# Altium PCB 175-00016_rev2 SuperFin GPIO Apps Board.PcbDoc (part 2 of 2)
Units mil, origin at the board's own origin, x right, y up, seen from the top; angles counter-clockwise.
Board outline 3307.09 x 1358.27 mil, 6 copper layers (Top Layer (*.GTL), Mid-Layer 1 (*.G1), Internal Plane 1 (*.GP1), Internal Plane 2 (GP2), Internal Plane 3 (GP3), Bottom Layer (GBL)); 57 components, 95 nets, 358 pads, 100 vias.
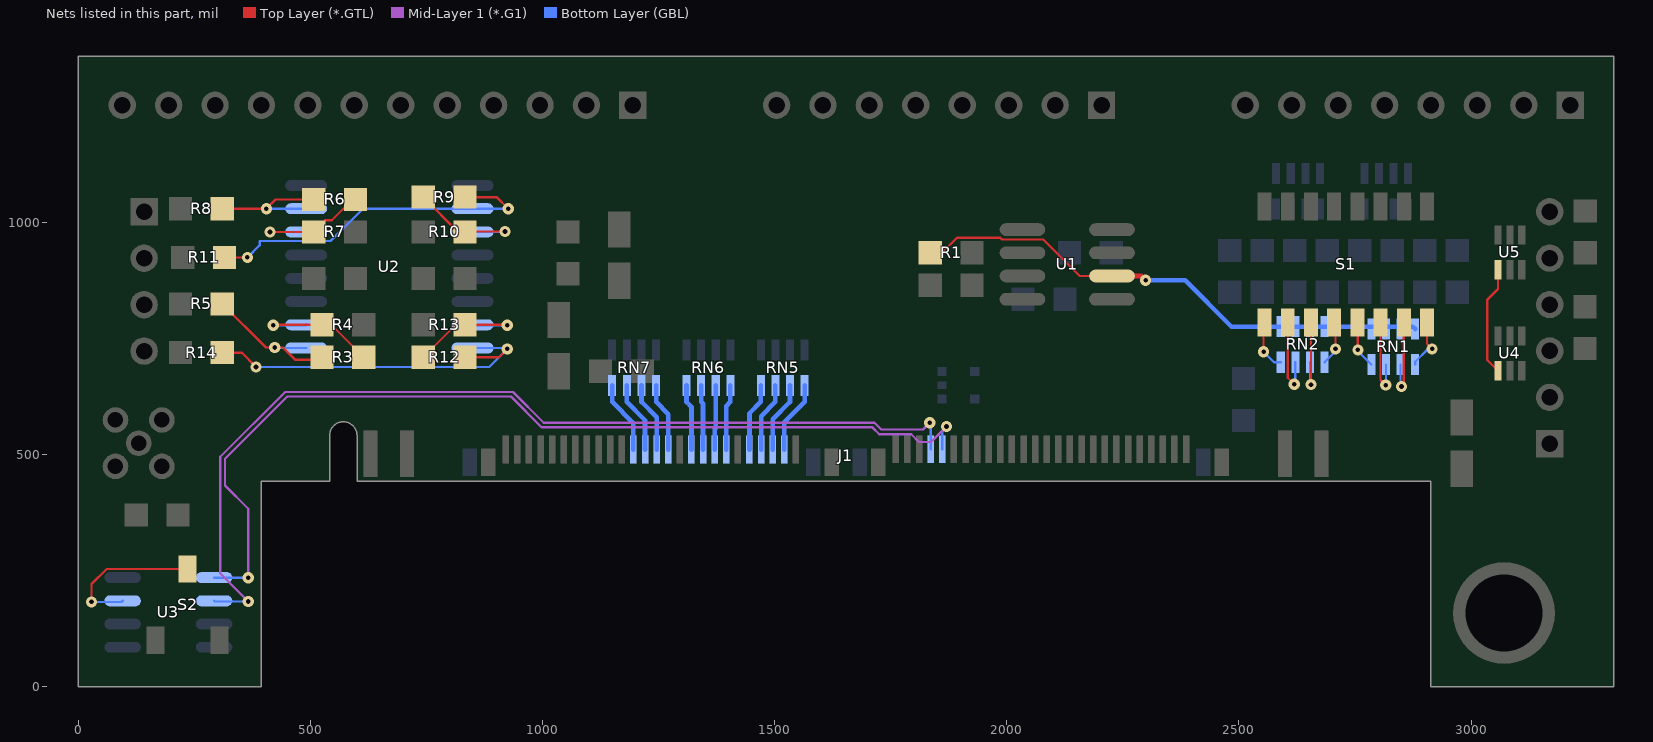
[diagram p6: the nets of this part, all layers, seen from the top]

## Via types
v1: diameter 24, hole 10, Top Layer (*.GTL) to Bottom Layer (GBL), 100 vias

## Nets (pads, with @x,y where several pads share a name; then routed paths per layer and width w, separated by ;. In a path a pad name is that pad's centre, name@x,y a point inside that pad or via, vN(x,y) a via of type N, cw(c..) or ccw(c..) an arc to the next point about the centre after c; other vN are vias at no path point) (continued)
NetR1_2: R1.2 RN1.1 RN1.3 RN1.5 RN1.7 RN2.1 RN2.3 RN2.5 RN2.7 U1.6 | length 1139.3
  Top Layer (*.GTL) w5: R1.2@1835,935 1860,935 1892.5,967.5 1985.52,967.5 1989.3,963.72 2078.28,963.72 2157,885 U1.6@2226.46,885
  Top Layer (*.GTL) w10: U1.6@2226.46,885 2290,885 v1(2299,876)
  Bottom Layer (GBL) w10: v1(2299,876) 2384,876 2483.94,776.06 RN2.1@2590,776.06 RN2.3@2621.5,776.06 RN2.5@2652.99,776.06 RN2.7@2684.49,776.06 2874.49,776.06 RN1.7@2879.49,771.06
NetR3_1: R3.1 R4.2 U2.2 | length 295.7
  Top Layer (*.GTL) w5: v1(420,779) 421,780 R4.2@525,780 545,780 R3.1@615,710
  Bottom Layer (GBL) w5: v1(420,779) 489.87,779 U2.2@490.87,780
NetR3_2: R3.2 R5.2 U2.1 | length 335.1
  Top Layer (*.GTL) w5: R5.2@310,825 404,731 v1(423,731) 441,731 467,705 520,705 R3.2@525,710
  Bottom Layer (GBL) w5: v1(423,731) 424,730 U2.1@490.87,730
NetR6_1: R6.1 R7.2 U2.6 | length 290.8
  Top Layer (*.GTL) w5: v1(413,980) R7.2@506.89,980 531.89,1005 546,1005 591,1050 R6.1@596.89,1050
  Bottom Layer (GBL) w5: v1(413,980) U2.6@490.87,980
NetR6_2: R6.2 R8.2 U2.7 | length 291
  Top Layer (*.GTL) w5: R8.2@310,1030 v1(405,1030) 425,1050 R6.2@506.89,1050
  Bottom Layer (GBL) w5: v1(405,1030) U2.7@490.87,1030
NetR9_1: R9.1 R10.2 U2.11 | length 277.7
  Top Layer (*.GTL) w5: R9.1@743.11,1055 818.11,980 R10.2@833.11,980 834.11,981 v1(919,981)
  Bottom Layer (GBL) w5: U2.11@849.13,980 918,980 v1(919,981)
NetR9_2: R9.2 R11.2 U2.10 | length 763
  Top Layer (*.GTL) w5: R11.2@315,925 363.98,925 v1(364.17,925.2) ; R9.2@833.11,1055 901,1055 v1(926,1030)
  Bottom Layer (GBL) w5: v1(364.17,925.2) 390.5,951.52 390.5,960.5 543.45,960.5 612.95,1030 U2.10@849.13,1030 v1(926,1030)
NetR12_1: R12.1 R13.2 U2.15 | length 285.6
  Top Layer (*.GTL) w5: R12.1@743.11,710 813.11,780 R13.2@833.11,780 923,780 v1(924,779)
  Bottom Layer (GBL) w5: U2.15@849.13,780 850.13,779 v1(924,779)
NetR12_2: R12.2 R14.2 U2.16 | length 817
  Top Layer (*.GTL) w5: R14.2@310,720 351.87,720 v1(382.87,689) ; R12.2@833.11,710 906,710 v1(924,728)
  Bottom Layer (GBL) w5: v1(382.87,689) 885,689 v1(924,728) 922,730 U2.16@849.13,730
NetRN1_2: RN1.2 S1.13 | length 103.1
  Top Layer (*.GTL) w5: S1.13@2755,785 2756,784 v1(2756,726)
  Bottom Layer (GBL) w5: v1(2756,726) 2756,723.29 RN1.2@2785,694.29
NetRN1_4: RN1.4 S1.14 | length 184.1
  Top Layer (*.GTL) w5: S1.14@2805,785 2805,661 v1(2816,650)
  Bottom Layer (GBL) w5: v1(2816,650) 2816.5,650.5 RN1.4@2816.5,694.29
NetRN1_6: RN1.6 S1.15 | length 188.2
  Top Layer (*.GTL) w5: v1(2850,647) 2855,652 S1.15@2855,785
  Bottom Layer (GBL) w5: RN1.6@2847.99,694.29 2847.99,649.01 v1(2850,647)
NetRN1_8: RN1.8 S1.16 | length 106.7
  Top Layer (*.GTL) w5: S1.16@2905,785 2905,739 v1(2916,728)
  Bottom Layer (GBL) w5: RN1.8@2879.49,694.29 2879.49,700.49 v1@2907,728
NetRN2_2: RN2.2 S1.9 | length 110.2
  Top Layer (*.GTL) w5: v1(2553,722) 2553,783 S1.9@2555,785
  Bottom Layer (GBL) w5: v1(2553,722) 2575.71,699.29 RN2.2@2590,699.29
NetRN2_4: RN2.4 S1.10 | length 187.1
  Top Layer (*.GTL) w5: S1.10@2605,785 2605,666 v1(2619,652)
  Bottom Layer (GBL) w5: v1(2619,652) 2621.5,654.5 RN2.4@2621.5,699.29
NetRN2_6: RN2.6 S1.11 | length 183.1
  Top Layer (*.GTL) w5: v1(2655,651) S1.11@2655,785
  Bottom Layer (GBL) w5: RN2.6@2652.99,699.29 2652.99,653.01 v1(2655,651)
NetRN2_8: RN2.8 S1.12 | length 96.7
  Top Layer (*.GTL) w5: S1.12@2705,785 2708,782 v1(2708,728)
  Bottom Layer (GBL) w5: RN2.8@2684.49,699.29 2708,722.8 v1(2708,728)
NetS2_2: S2.2 U3.7 | length 326.4
  Top Layer (*.GTL) w5: v1(28.54,183.07) 28.54,221.46 61.02,253.94 S2.2@235.24,253.94
  Bottom Layer (GBL) w5: v1(28.54,183.07) 93.11,183.07 U3.7@95.47,185.43
NetU4_4: U4.4 U5.4 | length 237.1
  Top Layer (*.GTL) w5: U4.4@3058.07,681.1 3034.45,704.72 3034.45,833.66 3058.07,857.28 U5.4@3058.07,898.62
OPTO_INPUT_0: J1.56 RN5.8 | length 156.4
  Bottom Layer (GBL) w10: J1.56@1520.65,511 1520.65,569.98 1564.49,613.81 RN5.8@1564.49,649.29
OPTO_INPUT_1: J1.58 RN5.6 | length 153.8
  Bottom Layer (GBL) w10: J1.58@1495.65,511 1495.65,576.47 1532.99,613.81 RN5.6@1532.99,649.29
OPTO_INPUT_2: J1.60 RN5.4 | length 151.1
  Bottom Layer (GBL) w10: J1.60@1470.65,511 1470.65,582.97 1501.5,613.81 RN5.4@1501.5,649.29
OPTO_INPUT_3: J1.62 RN5.2 | length 148.4
  Bottom Layer (GBL) w10: J1.62@1445.65,511 1445.65,589.46 1470,613.81 RN5.2@1470,649.29
OPTO_INPUT_4: J1.66 RN6.8 | length 142
  Bottom Layer (GBL) w10: J1.66@1395.65,511 1395.65,604.98 1404.49,613.81 RN6.8@1404.49,649.29
OPTO_INPUT_5: J1.68 RN6.6 | length 139.3
  Bottom Layer (GBL) w10: J1.68@1370.65,511 1370.65,554.76 1372.99,557.1 RN6.6@1372.99,649.29
OPTO_INPUT_6: J1.70 RN6.4 | length 140
  Bottom Layer (GBL) w10: RN6.4@1341.5,649.29 1341.5,613.81 1345.65,609.66 J1.70@1345.65,511
OPTO_INPUT_7: J1.72 RN6.2 | length 142.7
  Bottom Layer (GBL) w10: RN6.2@1310,649.29 1310,613.81 1320.65,603.16 J1.72@1320.65,511
OPTO_INPUT_8: J1.76 RN7.8 | length 149.1
  Bottom Layer (GBL) w10: RN7.8@1244.49,649.29 1244.49,613.81 1270.65,587.65 J1.76@1270.65,511
OPTO_INPUT_9: J1.78 RN7.6 | length 151.8
  Bottom Layer (GBL) w10: RN7.6@1212.99,649.29 1212.99,613.81 1245.65,581.15 J1.78@1245.65,511
OPTO_INPUT_10: J1.80 RN7.4 | length 154.5
  Bottom Layer (GBL) w10: RN7.4@1181.5,649.29 1181.5,613.81 1220.65,574.66 J1.80@1220.65,511
OPTO_INPUT_11: J1.82 RN7.2 | length 157.2
  Bottom Layer (GBL) w10: RN7.2@1150,649.29 1150,613.81 1195.65,568.16 J1.82@1195.65,511
SLOT_ID0: J1.44 U3.1 | length 2067.5
  Mid-Layer 1 (*.G1) w5: v1(366.14,235.24) 366.14,383.86 315.94,434.06 315.94,491.5 449.8,625.35 932.05,625.35 998.4,559 1710.48,559 1725.19,544.29 1794.27,544.29 1811,527.56 1836.56,527.56 v1(1870,561)
  Bottom Layer (GBL) w5: U3.1@292.32,235.43 292.52,235.24 v1(366.14,235.24) ; J1.44@1860.99,512.06 1860.99,549.99 1870,559 v1(1870,561)
SLOT_ID1: J1.46 U3.2 | length 2094.3
  Mid-Layer 1 (*.G1) w5: v1(366.14,184.06) 305.94,244.25 305.94,495.64 445.66,635.35 936.19,635.35 1002.54,569 1714.62,569 1729.33,554.29 1819.29,554.29 v1(1834,569)
  Bottom Layer (GBL) w5: U3.2@292.32,185.43 293.7,184.06 v1(366.14,184.06) ; v1(1834,569) 1835.99,567.01 J1.46@1835.99,512.06
pads on no net: J1.0 J1.7 J1.9 J1.23 J1.24 J1.25 J1.26 J1.27 J1.28 J1.29 J1.30 J1.34 J1.36 J1.38 J1.40 J1.43 J1.45 J1.47 J1.75 J1.77 J1.79 J1.81 J1.85 J1.86 J1.87 J1.88 J1.89 J1.90 J1.91 J1.92 J1.95 J1.96 J1.97 J1.98 J1.99 J1.100 J1.101 J1.102 U1.1 U1.5 U1.8 U2.8 U2.9 U4.3
copper on no net: | length 279.9
  Bottom Layer (GBL) w10: 1869.35,1062.99 ccw(c1824.8,1062.99) 1869.35,1062.99

## Polygon pours and split planes (outlines as drawn)
GND on Internal Plane 1 (*.GP1) (split plane): 3286.99,442.91 3286.99,20.1 2933.48,20.1 2933.48,442.91 2933.1,446.83 2931.95,450.6 2930.1,454.08 2927.6,457.12 2924.55,459.62 2921.08,461.48 2917.31,462.62 2913.39,463.01 620.39,463.01 620.39,541.34 620.35,541.78 620.06,546.89 619.13,552.38 617.59,557.72 615.46,562.86 612.77,567.73 609.55,572.27 605.84,576.42 601.69,580.12 597.16,583.34 592.29,586.03 587.15,588.16 581.8,589.7 576.32,590.63 570.77,590.94 565.21,590.63 559.73,589.7 554.38,588.16 549.24,586.03 544.37,583.34 539.84,580.12 535.69,576.42 531.98,572.27 528.76,567.73 526.07,562.86 523.94,557.72 522.4,552.38 521.47,546.89 521.18,541.78 521.14,541.34 521.14,463.01 393.7,463.01 389.78,462.62 386.01,461.48 382.54,459.62 379.49,457.12 376.99,454.08 375.13,450.6 373.99,446.83 373.6,442.91 373.6,20.1 20.1,20.1 20.1,1338.17 3286.99,1338.17
+12V on Internal Plane 2 (GP2) (split plane): 3286.99,442.91 3286.99,20.1 2933.48,20.1 2933.48,442.91 2933.1,446.83 2931.95,450.6 2930.1,454.08 2927.6,457.12 2924.55,459.62 2921.08,461.48 2917.31,462.62 2913.39,463.01 620.39,463.01 620.39,541.34 620.35,541.78 620.06,546.89 619.13,552.38 617.59,557.72 615.46,562.86 612.77,567.73 609.55,572.27 605.84,576.42 601.69,580.12 597.16,583.34 592.29,586.03 587.15,588.16 581.8,589.7 576.32,590.63 570.77,590.94 565.21,590.63 559.73,589.7 554.38,588.16 549.24,586.03 544.37,583.34 539.84,580.12 535.69,576.42 531.98,572.27 528.76,567.73 526.07,562.86 523.94,557.72 522.4,552.38 521.47,546.89 521.18,541.78 521.14,541.34 521.14,463.01 393.7,463.01 389.78,462.62 386.01,461.48 382.54,459.62 379.49,457.12 376.99,454.08 375.13,450.6 373.99,446.83 373.6,442.91 373.6,20.1 20.1,20.1 20.1,1338.17 3286.99,1338.17
-12V on Internal Plane 3 (GP3) (split plane): 3286.99,442.91 3286.99,20.1 2933.48,20.1 2933.48,442.91 2933.1,446.83 2931.95,450.6 2930.1,454.08 2927.6,457.12 2924.55,459.62 2921.08,461.48 2917.31,462.62 2913.39,463.01 620.39,463.01 620.39,541.34 620.35,541.78 620.06,546.89 619.13,552.38 617.59,557.72 615.46,562.86 612.77,567.73 609.55,572.27 605.84,576.42 601.69,580.12 597.16,583.34 592.29,586.03 587.15,588.16 581.8,589.7 576.32,590.63 570.77,590.94 565.21,590.63 559.73,589.7 554.38,588.16 549.24,586.03 544.37,583.34 539.84,580.12 535.69,576.42 531.98,572.27 528.76,567.73 526.07,562.86 523.94,557.72 522.4,552.38 521.47,546.89 521.18,541.78 521.14,541.34 521.14,463.01 393.7,463.01 389.78,462.62 386.01,461.48 382.54,459.62 379.49,457.12 376.99,454.08 375.13,450.6 373.99,446.83 373.6,442.91 373.6,20.1 20.1,20.1 20.1,1338.17 3286.99,1338.17

## Other copper
Top Layer (*.GTL):
  text "*.GTL - TOP LAYER GERBER DATA" at 286.34,-1797.05 h80
Mid-Layer 1 (*.G1):
  text "*.G1 - MID LAYER 1 GERBER DATA" at 286.34,-1797.05 h80
Bottom Layer (GBL):
  text "LCOGT" at 1459.65,1044.29 h50
  text "c  2011" at 1841.54,1044.29 h50
  text "175-00016, rev2" at 1906.5,944.88 h50
  text "*.GBL - BOTTOM LAYER GERBER DATA" at 286.34,-1797.05 h80
Internal Plane 1 (*.GP1) (plane layer: these items are gaps in the copper):
  text "*.GP1 - INTERNAL PLANE LAYER 1 GERBER DATA" at 286.34,-1797.05 h80
Internal Plane 2 (GP2) (plane layer: these items are gaps in the copper):
  text "*.GP2 - INTERNAL PLANE LAYER 2 GERBER DATA" at 286.34,-1797.05 h80
Internal Plane 3 (GP3) (plane layer: these items are gaps in the copper):
  text "*.GP3- INTERNAL PLANE LAYER 3 GERBER DATA" at 286.34,-1797.05 h80

## Silkscreen, mask and mechanical layers (free items; w line width, h text height)
Top Overlay:
  rectangle: 2266.73,1012.8 2455.71,1144.69
  text "SuperFin GPIO Apps Board" at 1236.22,1146.65 h40
  text "780-00019 SCH REV:" at 1556.82,1072.82 h40
  text "PGM" at 102.36,136.81 h30 r90
  text "*.GTO - TOP OVERLAY GERBER DATA" at 286.34,-1797.05 h80
Bottom Overlay:
  lines w7.87: 2380,990 2430,960
  text "1 Hz" at 342.52,561.02 h30
  text "GPS" at 312.99,501.97 h30
  text "*GBO -- BOTTOM OVERLAY GERBER DATA" at 286.34,-1797.05 h80
Top Paste:
  text "*.GTP - TOP-SIDE SOLDER PASTE MASK" at 286.33,-1797.04 h80
Bottom Paste:
  text "*.GBP - BOTTOM-SIDE SOLDER PASTE MASK" at 286.33,-1797.04 h80
Top Solder:
  text "*.GTS - TOP SOLDER MASK GERBER DATA" at 286.34,-1797.05 h80
Bottom Solder:
  rectangle: 1155.51,915.35 1929.13,1134.84
  text "*.GBS - BOTTOM SOLDER MASK GERBER DATA" at 286.34,-1797.05 h80
Mechanical 1:
  lines w39.37: 393.7,442.91 393.7,0 0,0 0,364.17 0,659.45 0,1358.27 3307.09,1358.27 3307.09,816.93 3307.09,442.91 3307.09,0 2913.39,0 2913.39,442.91 1653.54,442.91 600.29,442.91
Mechanical 2:
  lines w10: -13462.66,-7877.05 7537.34,-7877.05 7537.34,8122.95 -13462.66,8122.95 -13462.66,-7877.05 ; 3482.34,-7771.05 ccw(c3532.34,-7771.05) 3532.34,-7821.05 3862.34,-7821.05 ccw(c3862.34,-7781.05) 3902.34,-7781.05 3902.34,-7611.05 ccw(c3862.34,-7611.05) 3862.34,-7571.05 3482.34,-7571.05 3482.34,-7771.05 ; 3482.34,-7481.05 ccw(c3532.34,-7481.05) 3532.34,-7531.05 7432.34,-7531.05 ccw(c7432.34,-7481.05) 7482.34,-7481.05 7482.34,-7291.05 ccw(c7432.34,-7291.05) 7432.34,-7241.05 3482.34,-7241.05 3482.34,-7481.05 ; 3482.34,-7151.05 ccw(c3532.34,-7151.05) 3532.34,-7201.05 5412.34,-7201.05 ccw(c5412.34,-7151.05) 5462.34,-7151.05 5462.34,-7001.05 ccw(c5412.34,-7001.05) 5412.34,-6951.05 3482.34,-6951.05 3482.34,-7151.05 ; 3482.34,-6871.05 ccw(c3522.34,-6871.05) 3522.34,-6911.05 4332.34,-6911.05 ccw(c4332.34,-6861.05) 4382.34,-6861.05 4382.34,-6711.05 ccw(c4332.34,-6711.05) 4332.34,-6661.05 3482.34,-6661.05 3482.34,-6871.05 ; 3942.34,-7781.05 ccw(c3982.34,-7781.05) 3982.34,-7821.05 5942.34,-7821.05 ccw(c5942.34,-7781.05) 5982.34,-7781.05 5982.34,-7611.05 ccw(c5942.34,-7611.05) 5942.34,-7571.05 3942.34,-7571.05 3942.34,-7781.05 ; 4422.34,-6861.05 ccw(c4472.34,-6861.05) 4472.34,-6911.05 5412.34,-6911.05 ccw(c5412.34,-6861.05) 5462.34,-6861.05 5462.34,-6711.05 ccw(c5412.34,-6711.05) 5412.34,-6661.05 4422.34,-6661.05 4422.34,-6861.05 ; 5502.34,-7151.05 ccw(c5552.34,-7151.05) 5552.34,-7201.05 7432.34,-7201.05 ccw(c7432.34,-7151.05) 7482.34,-7151.05 7482.34,-7001.05 ccw(c7432.34,-7001.05) 7432.34,-6951.05 5502.34,-6951.05 5502.34,-7151.05 ; 5502.34,-6861.05 ccw(c5552.34,-6861.05) 5552.34,-6911.05 6492.34,-6911.05 ccw(c6492.34,-6861.05) 6542.34,-6861.05 6542.34,-6711.05 ccw(c6492.34,-6711.05) 6492.34,-6661.05 5502.34,-6661.05 5502.34,-6861.05 ; 6022.34,-7771.05 ccw(c6072.34,-7771.05) 6072.34,-7821.05 6402.34,-7821.05 ccw(c6402.34,-7781.05) 6442.34,-7781.05 6442.34,-7611.05 ccw(c6402.34,-7611.05) 6402.34,-7571.05 6022.34,-7571.05 6022.34,-7771.05 ; 6482.34,-7781.05 ccw(c6522.34,-7781.05) 6522.34,-7821.05 7432.34,-7821.05 ccw(c7432.34,-7771.05) 7482.34,-7771.05 7482.34,-7621.05 ccw(c7432.34,-7621.05) 7432.34,-7571.05 6482.34,-7571.05 6482.34,-7781.05 ; 6582.34,-6861.05 ccw(c6632.34,-6861.05) 6632.34,-6911.05 7432.34,-6911.05 ccw(c7432.34,-6861.05) 7482.34,-6861.05 7482.34,-6711.05 ccw(c7432.34,-6711.05) 7432.34,-6661.05 6582.34,-6661.05 6582.34,-6861.05
  lines w16: -12713.62,-3350.76 -7580.67,-3350.76 ; -12713.62,-3051.86 -7580.67,-3051.86 ; -12773.62,-5578.2 ccw(c-12676.62,-5578.2) -12676.62,-5675.2 -7617.67,-5675.2 ccw(c-7617.67,-5578.2) -7520.67,-5578.2 -7520.67,-2683.61 ccw(c-7617.67,-2683.61) -7617.67,-2586.61 -12676.62,-2586.61 ccw(c-12676.62,-2683.61) -12773.62,-2683.61 -12773.62,-5578.2
  lines w20: -13442.6,-7231.17 cw(c-13392.66,-7306.05) -13392.66,-7216.05 -12932.66,-7216.05 cw(c-12932.66,-7306.05) -12842.66,-7306.05 -12842.66,-7356.05 ccw(c-12832.66,-7356.05) -12832.66,-7366.05 -10192.66,-7366.05 cw(c-10192.66,-7456.05) -10102.66,-7456.05 -10102.66,-7796.05 cw(c-10192.66,-7796.05) -10117.79,-7845.98 ; 3438.51,-7861.03 cw(c3532.34,-7771.05) 3402.34,-7771.05 3402.34,-6101.05 cw(c3532.34,-6101.05) 3532.34,-5971.05 7432.34,-5971.05 cw(c7432.34,-6101.05) 7521,-6005.97 ; -13442.66,-7796.05 ccw(c-13392.66,-7796.05) -13392.66,-7846.05 -10192.66,-7846.05 ccw(c-10192.66,-7796.05) -10142.66,-7796.05 -10142.66,-7456.05 ccw(c-10192.66,-7456.05) -10192.66,-7406.05 -12832.66,-7406.05 cw(c-12832.66,-7356.05) -12882.66,-7356.05 -12882.66,-7306.05 ccw(c-12932.66,-7306.05) -12932.66,-7256.05 -13392.66,-7256.05 ccw(c-13392.66,-7306.05) -13442.66,-7306.05 -13442.66,-7796.05 ; -5932.66,-7697.05 ccw(c-5802.66,-7697.05) -5802.66,-7827.05 -1062.66,-7827.05 ccw(c-1062.66,-7697.05) -932.66,-7697.05 -932.66,-6107.05 ccw(c-1062.66,-6107.05) -1062.66,-5977.05 -5802.66,-5977.05 ccw(c-5802.66,-6107.05) -5932.66,-6107.05 -5932.66,-7697.05 ; 3442.34,-7771.05 ccw(c3532.34,-7771.05) 3532.34,-7861.05 7432.34,-7861.05 ccw(c7432.34,-7771.05) 7522.34,-7771.05 7522.34,-6101.05 ccw(c7432.34,-6101.05) 7432.34,-6011.05 3532.34,-6011.05 ccw(c3532.34,-6101.05) 3442.34,-6101.05 3442.34,-7771.05
  lines w24: -3382.66,-7667.05 -3232.66,-7667.05 ; -3382.66,-7417.05 -3232.66,-7417.05 ; -3382.66,-7167.05 -3232.66,-7167.05 ; -3382.66,-6917.05 -3232.66,-6917.05 ; -3382.66,-6667.05 -3232.66,-6667.05
  lines w30: -13962.66,-8377.05 8037.34,-8377.05 8037.34,8622.95 -13962.66,8622.95 -13962.66,-8377.05
  lines w50: 3627.34,-6512.05 5277.34,-6512.05 ; 3627.34,-6132.05 5277.34,-6132.05 ; 5277.34,-6512.05 3617.34,-6512.05 3617.34,-6132.05 5277.34,-6132.05 ; 5277.34,-6512.05 5277.34,-6132.05
  text "NOTES (UNLESS OTHERWISE SPECIFIED):" at -13142.66,7598.95 h90
  text "GENERAL" at -13042.66,7398.95 h90
  text "1)" at -12942.66,7198.9 h75
  text "PCB IS 6-LAYER, .062\" THICK." at -12742.66,7198.92 h75
  text "2)" at -12942.66,7048.9 h75
  text "CONSTRUCTION IS SOLDER-MASK-OVER-BARE-COPPER (SMOBC)." at -12742.66,7048.9 h75
  text "3)" at -12942.66,6898.9 h75
  text "ACCEPTABILITY SHALL BE BASED ON IPC-A-600, CLASS 2." at -12742.66,6898.9 h75
  text "4)" at -12942.66,6748.9 h75
  text "THE FOLLOWING GERBER RS274X PHOTO TOOL FILES SHALL BE USED TO DEFINE ALL CIRCUIT FEATURES:" at -12742.66,6748.9 h75
  text "*.GTL - TOP LAYER GERBER DATA" at -12468.66,6537.95 h80
  text "*.G1 - MID LAYER 1 GERBER DATA" at -12468.66,6384.29 h80
  text "*.GP1 - INTERNAL PLANE LAYER 1 GERBER DATA" at -12468.66,5923.29 h80
  text "*.GP2 - INTERNAL PLANE LAYER 2 GERBER DATA" at -12468.66,5769.62 h80
  text "*.GP3- INTERNAL PLANE LAYER 3 GERBER DATA" at -12468.66,5615.96 h80
  text "*.GBL - BOTTOM LAYER GERBER DATA" at -12468.66,5154.96 h80
  text "*.GTO - TOP OVERLAY GERBER DATA" at -12468.66,5001.29 h80
  text "*.GTS - TOP SOLDER MASK GERBER DATA" at -12468.66,4847.62 h80
  text "*.GTP - TOP-SIDE SOLDER PASTE MASK" at -12468.67,4693.95 h80
  text "*GBO BOTTOM OVERLAY GERBER DATA" at -12468.66,4540.29 h80
  text "*.GBS - BOTTOM SOLDER MASK GERBER DATA" at -12468.66,4386.63 h80
  text "*.GBP - BOTTOM-SIDE SOLDER PASTE MASK" at -12468.67,4232.95 h80
  text "5)" at -13039.66,3517.19 h75
  text "THE PHOTO TOOL SHALL NOT BE COMPENSATED WITHOUT PRIOR ENGINEERING APPROVAL." at -12839.66,3517.19 h75
  text "PCB DESIGNER: RICH LOBDILL   PH (805) 880-1621  FAX (805) 961-1792." at -12839.66,3367.24 h75
  text "FABRICATION TOLERANCES" at -12984.66,3040.95 h90
  text "6)" at -12884.66,2840.9 h75
  text "END PRODUCT CONDUCTOR WIDTHS AND PAD DIAMETERS SHALL NOT VARY MORE THAN" at -12684.66,2840.9 h75
  text "0.002\" FROM THE 1:1 DIMENSIONS OF THE MASTER ARTWORK." at -12684.66,2690.95 h75
  text "7)" at -12884.66,2540.9 h75
  text "THE CONDUCTIVE PATTERN SHALL BE POSITIONED SO THAT THE LOCATION OF ANY PAD OR" at -12684.66,2540.9 h75
  text "LAND SHALL BE WITHIN 0.005\" DIAMETER TO THE TRUE POSITION OF THE HOLE IT CIRCUMSCRIBES." at -12684.66,2390.95 h75
  text "8)" at -12884.66,2240.9 h75
  text "ALL DRILL HOLE SIZES AND TOLERANCES APPLY AFTER PLATING." at -12684.66,2240.9 h75
  text "9)" at -12884.66,2090.9 h75
  text "THE MINIMUM ANNULAR RING SHALL BE 0.005\"." at -12684.66,2090.9 h75
  text "10)" at -12939.66,1940.9 h75
  text "BOW AND TWIST SHALL NOT EXCEED 0.010\" PER INCH." at -12684.66,1940.9 h75
  text "11)" at -12929.66,1790.9 h75
  text "FOR PCB ROUTING DIMENSIONS: .XXX = +/-.005\"  .XX = +/-.020\"" at -12684.66,1790.9 h75
  text "MATERIAL" at -12984.66,1590.95 h90
  text "12)" at -12939.66,1390.9 h75
  text "BASE MATERIAL IS FR4 EPOXY FIBERGLASS" at -12677.66,1384.95 h75
  text "SEE STACK-UP LEGEND FOR COPPER CLADDING CALL OUTS" at -12677.66,1244.95 h75
  text "13)" at -12939.66,1240.9 h75
  text "PLATING" at -12984.66,1040.95 h90
  text "14)" at -12939.66,845.9 h75
  text "ALL HOLES AND CONDUCTIVE SURFACES SHALL BE PLATED WITH A MINIMUM OF 0.001\" COPPER." at -12684.66,845.9 h75
  text "15)" at -12939.66,695.9 h75
  text "AFTER SOLDERMASK, ALL EXPOSED HOLES AND CONDUCTIVE SURFACES SHALL BE COATED" at -12684.66,695.9 h75
  text "WITH A GOLD IMMERSION PLATING TO PRESERVE SOLDERABILITY." at -12677.66,544.95 h75
  text "COATINGS" at -12984.66,345.95 h90
  text "16)" at -12934.66,150.9 h75
  text "THE SOLDERMASK SHALL BE BLACK LIQUID PHOTO-IMAGEABLE PER IPC-SM-840, TYPE-B, CLASS 2." at -12684.66,150.9 h75
  text "17)" at -12939.66,0.9 h75
  text "THE SOLDERMASK REGISTRATION ALLOWANCE IS 0.003\".  THERE SHALL BE NO SOLDERMASK ON" at -12684.66,0.9 h75
  text "ANY SOLDER PAD OR LAND." at -12684.66,-149.1 h75
  text "MARKING" at -12984.66,-349.05 h90
  text "18)" at -12939.66,-544.1 h75
  text "THE LEGEND SHALL BE SCREEN-PRINTED USING PERMANENT YELLOW EPOXY INK." at -12684.66,-544.1 h75
  text "19)" at -12939.66,-694.1 h75
  text "THE SCREEN PRINTING REGISTRATION ALLOWANCE IS 0.007\".  THERE SHALL BE NO INK ON ANY" at -12684.66,-694.1 h75
  text "SOLDER PAD OR LAND." at -12684.66,-844.05 h75
  text "20)" at -12949.66,-994.1 h75
  text "THE VENDOR CODE AND UL FLAMMABILITY RATING MAY BE ETCHED IN THE FOIL OR MARKED IN" at -12684.66,-994.1 h75
  text "PERMANENT EPOXY INK (VENDOR'S OPTION)." at -12684.66,-1144.05 h75
  text "ELECTRICAL TESTING" at -12984.66,-1344.05 h90
  text "21)" at -12939.66,-1539.1 h75
  text "ALL BOARDS SHALL BE ELECTRICALLY TESTED TO THE SUPPLIED IPC-D-356A NET LIST" at -12684.66,-1539.1 h75
  text "FOR CONTINUITY, OPENS AND SHORTS." at -12684.66,-1689.05 h75
  text "Layer Stack Up Detail for: 175-00016_rev2 SuperFin GPIO Apps Board.PcbDoc" at -12713.62,-2866.44 h69
  text "Layer" at -12713.62,-3163.36 h69
  text "COPPER THICKNESS" at -9296.26,-3226.38 h60
  text "Name" at -12713.62,-3301.36 h69
  text "1/2 oz" at -10039.37,-3527.56 h100
  text "Top Layer (*.GTL)" at -12713.62,-3535.13 h97
  text "1 OZ" at -10039.37,-3841.54 h100
  text "Mid-Layer 1 (*.G1)" at -12713.62,-3887.87 h97
  text "1 OZ" at -10039.37,-4213.58 h100
  text "Internal Plane 1 (*.GP1)" at -12713.62,-4240.61 h97
  text "1 OZ" at -10039.37,-4563.98 h100
  text "Internal Plane 2 (GP2)" at -12713.62,-4593.35 h97
  text "1 OZ" at -10039.37,-4911.42 h100
  text "Internal Plane 3 (GP3) (GP3)" at -12713.62,-4946.09 h97
  text "1/2 oz" at -10039.37,-5262.8 h100
  text "Bottom Layer (GBL)" at -12713.62,-5298.83 h97
  text "Las Cumbres Observatory, Inc." at 5447.34,-6152.05 h90
  text "Las Cumbres Observatory" at 3677.34,-6272.05 h150
  text "PRIMARY PCB SPECIFICATIONS" at -5485.66,-6287.05 h200
  text "6740 Cortona Dr." at 5887.34,-6306.05 h90
  text "Global Telescope Network" at 3837.34,-6432.05 h125
  text "Goleta, CA 93117" at 5837.34,-6456.05 h90
  text "(REFER TO COMPLETE SPEC LISTING AT LEFT FOR FURTHER DETAILS)" at -5832.66,-6492.05 h100
  text "www.lcogt.net" at 5977.34,-6602.05 h90
  text "DATE" at 3502.34,-6712.85 h32
  text "DESIGNED" at 4442.34,-6712.85 h32
  text "DRAWN" at 5522.34,-6712.85 h32
  text "SCALE" at 6602.34,-6712.85 h32
  text "NUMBER OF LAYERS" at -5732.66,-6742.05 h150
  text "6" at -2182.66,-6742.06 h150
  text "Rich Lobdill" at 5827.34,-6812.05 h55
  text "Rich Lobdill" at 4702.34,-6817.05 h55
  text "1 : 1" at 6887.34,-6831.05 h90
  text "3/30/2011" at 3532.34,-6838.05 h90
  text "FINISHED THICKNESS" at -5732.66,-6992.05 h150
  text ".062\"" at -2357.66,-6992.05 h150
  text "CHECKED/DATE" at 3502.34,-7002.85 h32
  text "APPROVED/DATE" at 5522.34,-7002.85 h32
  text "BASE MATERIAL" at -5732.66,-7242.05 h150
  text "FR4" at -2432.66,-7242.05 h150
  text "TITLE" at 3502.34,-7292.85 h32
  text "NOTICE" at -13387.66,-7401.05 h100
  text "175-00016, SuperFin GPIO Apps Board" at 3722.34,-7437.05 h100
  text "GOLD IMMERSION" at -2926.66,-7459.05 h150
  text "PLATING TYPE" at -5732.66,-7492.05 h150
  text "THIS DRAWING EMBODIES A PROPRIETARY DESIGN OWNED BY LAS CUMBRES" at -13352.66,-7516.05 h60
  text "OBSERVATORY.  IT IS SUBMITTED FOR A SPECIFIC PURPOSE UNDER A CON-" at -13352.66,-7616.05 h60
  text "SIZE" at 3502.34,-7622.85 h32
  text "DOC NO." at 3962.34,-7622.85 h32
  text "REV" at 6042.34,-7622.85 h32
  text "SHEET" at 6502.34,-7622.85 h32
  text "FIDENTIAL RELATIONSHIP, AND EXCEPT FOR PURPOSES EXPRESSLY GRANTED" at -13352.66,-7711.05 h60
  text "OF" at 6932.34,-7726.05 h60
  text "SOLDER MASK COLOR" at -5732.66,-7742.05 h150
  text "BLACK" at -2307.66,-7742.05 h150
  text "1" at 6762.34,-7746.05 h100
  text "X" at 7162.34,-7746.05 h100
  text "2" at 6187.34,-7759.05 h130
  text "-" at 4517.34,-7761.05 h130
  text "GPT" at 5237.06,-7775.84 h130
  text "C" at 3637.34,-7777.05 h100
  text "IN WRITING, ALL RIGHTS ARE RESERVED BY LAS CUMBRES OBSERVATORY." at -13352.66,-7801.05 h60
Mechanical 5:
  text "175-00016_Rev2, SuperFin GPIO Apps Brd" at 307.37,-1366.46 h80
  text "LAS CUMBRES OBSERVATORY     3/30/2011" at 307.37,-1516.48 h80
Drill Drawing:
  lines w10: -13462.66,-7877.05 7537.34,-7877.05 7537.34,8122.95 -13462.66,8122.95 -13462.66,-7877.05 ; 3482.34,-7771.05 ccw(c3532.34,-7771.05) 3532.34,-7821.05 3862.34,-7821.05 ccw(c3862.34,-7781.05) 3902.34,-7781.05 3902.34,-7611.05 ccw(c3862.34,-7611.05) 3862.34,-7571.05 3482.34,-7571.05 3482.34,-7771.05 ; 3482.34,-7481.05 ccw(c3532.34,-7481.05) 3532.34,-7531.05 7432.34,-7531.05 ccw(c7432.34,-7481.05) 7482.34,-7481.05 7482.34,-7291.05 ccw(c7432.34,-7291.05) 7432.34,-7241.05 3482.34,-7241.05 3482.34,-7481.05 ; 3482.34,-7161.05 ccw(c3522.34,-7161.05) 3522.34,-7201.05 4942.34,-7201.05 ccw(c4942.34,-7151.05) 4992.34,-7151.05 4992.34,-7001.05 ccw(c4942.34,-7001.05) 4942.34,-6951.05 3482.34,-6951.05 3482.34,-7161.05 ; 3942.34,-7781.05 ccw(c3982.34,-7781.05) 3982.34,-7821.05 5942.34,-7821.05 ccw(c5942.34,-7781.05) 5982.34,-7781.05 5982.34,-7611.05 ccw(c5942.34,-7611.05) 5942.34,-7571.05 3942.34,-7571.05 3942.34,-7781.05 ; 5032.34,-7151.05 ccw(c5082.34,-7151.05) 5082.34,-7201.05 6492.34,-7201.05 ccw(c6492.34,-7151.05) 6542.34,-7151.05 6542.34,-7001.05 ccw(c6492.34,-7001.05) 6492.34,-6951.05 5032.34,-6951.05 5032.34,-7151.05 ; 6022.34,-7771.05 ccw(c6072.34,-7771.05) 6072.34,-7821.05 6402.34,-7821.05 ccw(c6402.34,-7781.05) 6442.34,-7781.05 6442.34,-7611.05 ccw(c6402.34,-7611.05) 6402.34,-7571.05 6022.34,-7571.05 6022.34,-7771.05 ; 6482.34,-7781.05 ccw(c6522.34,-7781.05) 6522.34,-7821.05 7432.34,-7821.05 ccw(c7432.34,-7771.05) 7482.34,-7771.05 7482.34,-7621.05 ccw(c7432.34,-7621.05) 7432.34,-7571.05 6482.34,-7571.05 6482.34,-7781.05 ; 6582.34,-7151.05 ccw(c6632.34,-7151.05) 6632.34,-7201.05 7432.34,-7201.05 ccw(c7432.34,-7151.05) 7482.34,-7151.05 7482.34,-7001.05 ccw(c7432.34,-7001.05) 7432.34,-6951.05 6582.34,-6951.05 6582.34,-7151.05
  lines w20: -13437.6,-7246.17 cw(c-13387.66,-7321.05) -13387.66,-7231.05 -12927.66,-7231.05 cw(c-12927.66,-7321.05) -12837.66,-7321.05 -12837.66,-7371.05 ccw(c-12827.66,-7371.05) -12827.66,-7381.05 -10187.66,-7381.05 cw(c-10187.66,-7471.05) -10097.66,-7471.05 -10097.66,-7811.05 cw(c-10187.66,-7811.05) -10112.79,-7860.98 ; 3437.26,-7859.71 cw(c3532.34,-7771.05) 3402.34,-7771.05 3402.34,-6951.05 cw(c3482.34,-6951.05) 3482.34,-6871.05 7432.34,-6871.05 cw(c7432.34,-7001.05) 7521,-6905.97 ; -13437.66,-7811.05 ccw(c-13387.66,-7811.05) -13387.66,-7861.05 -10187.66,-7861.05 ccw(c-10187.66,-7811.05) -10137.66,-7811.05 -10137.66,-7471.05 ccw(c-10187.66,-7471.05) -10187.66,-7421.05 -12827.66,-7421.05 cw(c-12827.66,-7371.05) -12877.66,-7371.05 -12877.66,-7321.05 ccw(c-12927.66,-7321.05) -12927.66,-7271.05 -13387.66,-7271.05 ccw(c-13387.66,-7321.05) -13437.66,-7321.05 -13437.66,-7811.05 ; 3442.34,-7771.05 ccw(c3532.34,-7771.05) 3532.34,-7861.05 7432.34,-7861.05 ccw(c7432.34,-7771.05) 7522.34,-7771.05 7522.34,-7001.05 ccw(c7432.34,-7001.05) 7432.34,-6911.05 3482.34,-6911.05 ccw(c3482.34,-6951.05) 3442.34,-6951.05 3442.34,-7771.05
  lines w30: -13962.66,-8377.05 8037.34,-8377.05 8037.34,8622.95 -13962.66,8622.95 -13962.66,-8377.05
  text ".Legend" at -2988.66,-3760.05 h100
  text "DESIGNED" at 3502.34,-7002.85 h32
  text "DRAWN" at 5052.34,-7002.85 h32
  text "SCALE" at 6602.34,-7002.85 h32
  text "Rich Lobdill" at 3988.34,-7099.05 h55
  text "Rich Lobdill" at 5549.34,-7101.05 h55
  text "1 : 1" at 6887.34,-7121.05 h90
  text "TITLE" at 3502.34,-7292.85 h32
  text "NOTICE" at -13382.66,-7416.05 h100
  text "175-00016, SuperFin GPIO Apps Board" at 3719.34,-7437.05 h100
  text "THIS DRAWING EMBODIES A PROPRIETARY DESIGN OWNED BY LAS CUMBRES" at -13347.66,-7531.05 h60
  text "SIZE" at 3502.34,-7622.85 h32
  text "DOC NO." at 3962.34,-7622.85 h32
  text "REV" at 6042.34,-7622.85 h32
  text "SHEET" at 6502.34,-7622.85 h32
  text "OBSERVATORY.  IT IS SUBMITTED FOR A SPECIFIC PURPOSE UNDER A CON-" at -13347.66,-7631.05 h60
  text "FIDENTIAL RELATIONSHIP, AND EXCEPT FOR PURPOSES EXPRESSLY GRANTED" at -13347.66,-7726.05 h60
  text "OF" at 6932.34,-7726.05 h60
  text "2" at 6747.34,-7746.05 h100
  text "X" at 7162.34,-7746.05 h100
  text "-" at 4517.34,-7761.05 h130
  text "2" at 6182.34,-7761.05 h130
  text "C" at 3637.34,-7777.05 h120
  text "GD1" at 5337.34,-7777.05 h120
  text "IN WRITING, ALL RIGHTS ARE RESERVED BY LAS CUMBRES OBSERVATORY." at -13347.66,-7816.05 h60

## Dimensions
0,0 to 0,1358.27 on Mechanical 2
0,0 to 393.7,0 on Mechanical 2
0,1358.27 to 3307.09,1358.27 on Mechanical 2

## Text inside footprints (layer, text, board x,y; h text height)
J1: Top Overlay "1" at 2474,575 h30; Top Overlay "PC01" at 2640,573 h30